# Altium PCB PCB1.PcbDoc
Units mm, origin at the board's own origin, x right, y up, seen from the top; angles counter-clockwise.
Board outline 50.16 x 18.03 mm, 2 copper layers (Top Layer, Bottom Layer); 8 components, 7 nets, 31 pads, 4 vias.
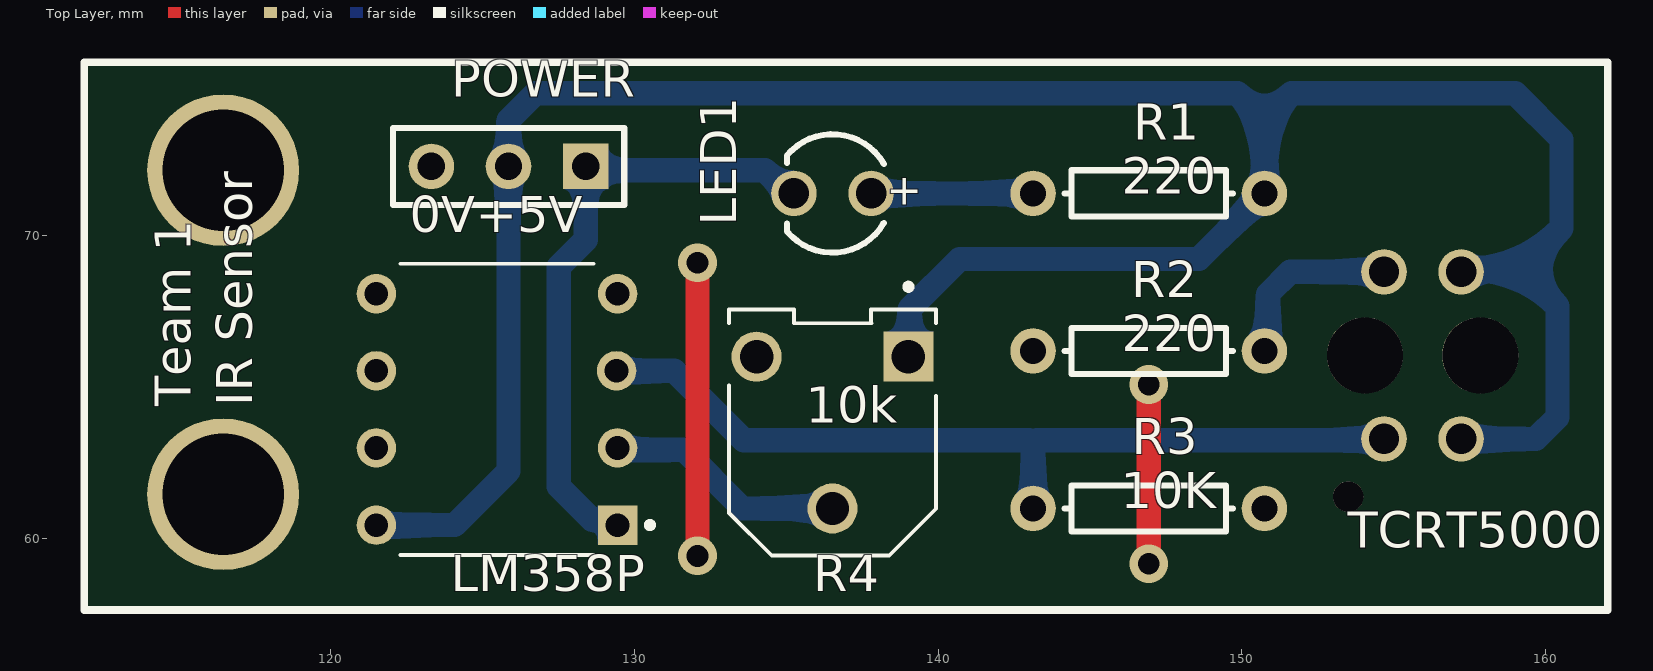
[diagram p0: Top Layer view]
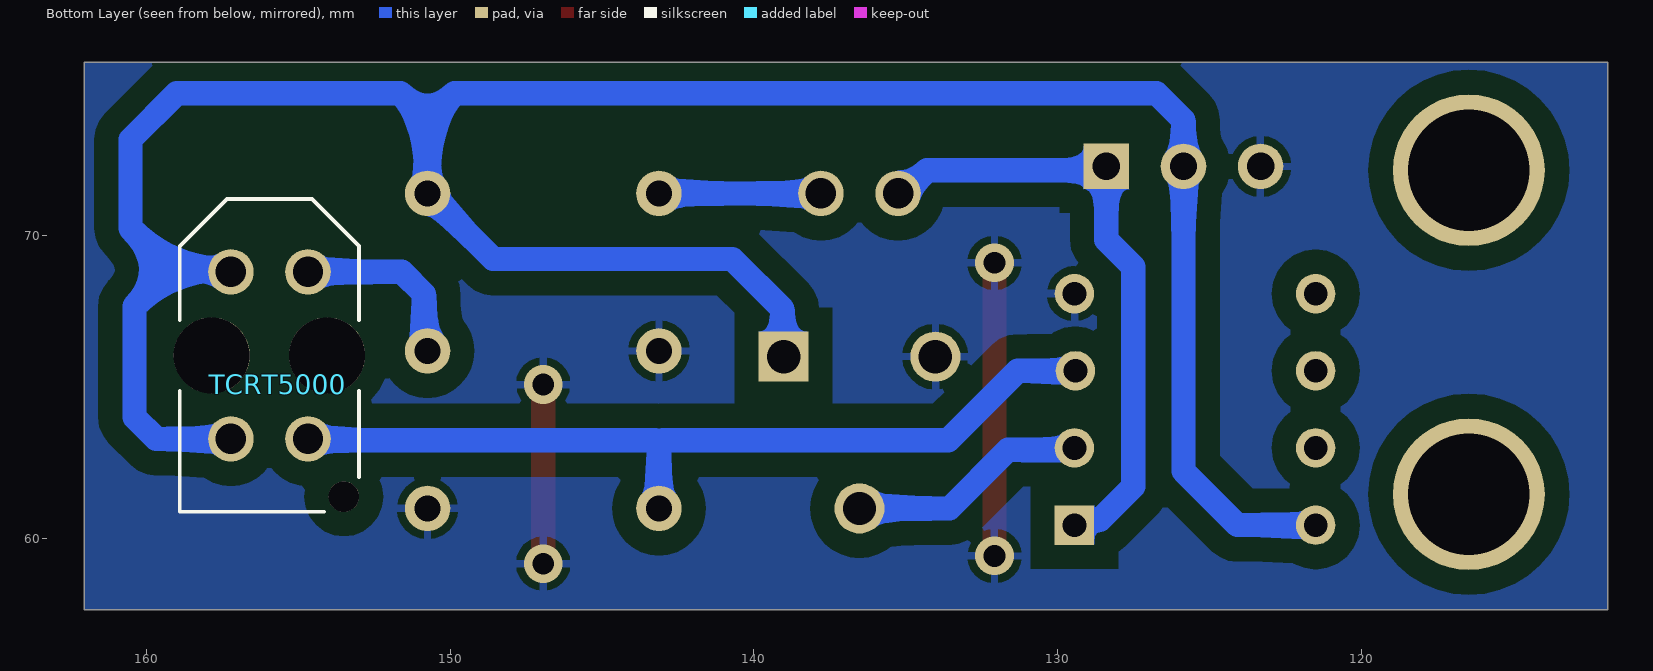
[diagram p1: Bottom Layer view, seen from below]

## Layer stack, top to bottom
Top Solder: solder mask 0.0102, Solder Resist, Dk 3.5
Top Layer: signal copper 0.0356
Dielectric 1: dielectric 0.32, FR-4, Dk 4.8
Bottom Layer: signal copper 0.0356
Bottom Solder: solder mask 0.0102, Solder Resist, Dk 3.5

## Board outline
111.887,57.658 162.052,57.658 162.052,75.692 111.887,75.692

## Design rules (kind name [scope] priority, off if disabled: settings)
Clearance B_GND [InNamedPolygon('B_GND')] p1: gap=0.8 ignorepadtopadclearanceinfootprint=FALSE
Clearance [All] p2: gap=0.8 ignorepadtopadclearanceinfootprint=FALSE
PolygonConnect [All] p1: connectstyle=Relief reliefconductorwidth=0.254 reliefentries=4 polygonreliefangle="90 Angle" airgapwidth=0.254
RoutingVias [All] p1: holewidth=0.711 width=1.27 viastyle="Through Hole" minholewidth=0.711 minwidth=1.27 maxholewidth=0.711 maxwidth=1.27
SolderMaskExpansion [All] p1: expansion=0.102 istentingtop=FALSE
UnRoutedNet [All] p1: checkbadconnections=TRUE
Width [All] p1: maxlimit=0.8 minlimit=0.8 preferedwidth=0.8
29 further rules are at their usual default settings.

## Components (designator, comment, footprint, x,y, rotation, side; value= is the part's Value field where it differs from the comment)
LED1 "151031SS06000" WL-TIRW_D3.9H5.3 136.525,71.374 r180 top
LM358P "" DIP794W45P254L959H508Q8 125.476,64.262 r180 top
POWER "" HDR1X3 128.397,72.263 r180 top
R1 "220" AXIAL-0.3 146.939,71.374 r0 top value=1K
R2 "220" AXIAL-0.3 146.939,66.187 r0 top
R3 "10K" AXIAL-0.3 146.939,61 r180 top
R4 "10k" TRIM_3306F-1-203 136.525,63.5 r90 top
TCRT5000 "" OPTO_TCRT5000 155.956,66.04 r90 bottom

## Footprints (in the part's own frame and the unit in brackets; to place one, negate y for a bottom-side part, rotate by r counter-clockwise, add the part's x,y. Pads: shape width x height; smd on the part's side, far side on the other; paste and mask are expansions set on the pad)
AXIAL-0.3 [mm] "Axial Device, Thru-Hole; 2 Leads; 0.3 in Pin Spacing"
  round 1.5 hole 0.85: 1(-3.81,0) 2(3.81,0)
  silkscreen extent -2.77,-0.76 2.77,0.76
DIP794W45P254L959H508Q8 [mm]
  rect 1.3x1.3 hole 0.78: 1(-3.97,3.81)
  round 1.3 hole 0.78: 2(-3.97,1.27) 3(-3.937,-1.27) 4(-3.97,-3.81) 5(3.97,-3.81) 6(3.97,-1.27) 7(3.97,1.27) 8(3.97,3.81)
  silkscreen extent -5.13,-4.8 3.18,4.8, body extent -5.84,-4.67 5.08,4.92, height 4.29
HDR1X3 [mm] "Connector; Header; 3 Position"
  rect 1.5x1.5 hole 0.9: 1(0,0)
  round 1.5 hole 0.9: 2(2.54,0) 3(5.08,0)
  silkscreen extent -1.27,-1.27 6.35,1.27
OPTO_TCRT5000 [mm]
  round 1.5 hole 1: A(2.75,1.27) CATH(2.75,-1.27) COLL(-2.75,1.27) E(-2.75,-1.27)
  round 1 hole 1 unplated: ""(-4.65,-2.45)
  round 2.5 hole 2.5 unplated: ""(0,-1.9) ""(0,1.9)
  silkscreen extent -5.15,-2.95 5.15,2.95, body extent -4.97,-3.3 5.23,3.5, height 6.72
TRIM_3306F-1-203 [mm]
  rect 1.65x1.65 hole 1.1: 1(2.5,-2.5)
  round 1.65 hole 1.1: 2(-2.5,0) 3(2.5,2.5)
  silkscreen extent -4.05,-3.41 4.9,3.41, body extent -3.78,-3.17 3.02,3.38, height 6.66
WL-TIRW_D3.9H5.3 [mm] "THT Infrared Round Waterclear, body diameter 3.9mm"
  round 1.5 hole 1: 1(1.27,0) 2(-1.27,0)
  silkscreen extent -1.69,-1.95 1.5,1.95, body extent -1.95,-1.95 1.62,1.95, height 5.33

## Part data
LED1: library part CMP-1488-00002-1, "THT LED round mono-color color lens, WL-TMRW, Super Red", Emitting color="Super Red", Manufacturer="Wuerth Elektronik", ComponentLink1Description="Manufacturer URL", ComponentLink1URL=http://www.we-online.com, ComponentLink2Description=Datasheet, ComponentLink2URL=http://katalog.we-online.de/pbs/datasheet/7448042001.pdfhttp://katalog.we-online.de/pbs/datasheet/7448042001.pdfhttp://katalog.we-online.de/pbs/datasheet/7448042001.pdfhttp://katalog.we-online.de/pbs/datasheet/151031SS06000.pdf, PackageReference="Type 3mm", PartNumber=151031SS06000
LM358P: library part LM358P, "Dual Operational Amplifiers", Package="PDIP-8 Texas Instruments", Arrow_Electronics-Purchase-URL=https://snapeda.com/shop?store=Arrow+Electronics&id=559457, Availability=Unavailable, DigiKey-Purchase-URL=https://snapeda.com/shop?store=DigiKey&id=559457, MF="Texas Instruments", Mouser-Purchase-URL=https://snapeda.com/shop?store=Mouser&id=559457, MP=LM358P, Price=None, SnapEDA_Link=https://www.snapeda.com/parts/LM358P/Texas%20Instruments/view-part/559457/?ref=snap, Texas_Instruments-Purchase-URL=https://snapeda.com/shop?store=Texas+Instruments&id=559457
POWER: library part "Header 3", "Header, 3-Pin", LatestRevisionDate=17-Jul-2002, LatestRevisionNote="Re-released for DXP Platform.", Publisher="Altium Limited"
R1 R2 R3: library part Res1, "Resistor", LatestRevisionDate=17-Jul-2002, LatestRevisionNote="Re-released for DXP Platform.", PackageDescription="Axial Device, Thru-Hole; 2 Leads; 0.3 in Pin Spacing", PackageReference=AXIAL-0.3, Published=8-Jun-2000, Publisher="Altium Limited"
R4: library part 3306F-1-203, "20 kOhms 0.2W", Package="6432 Bourns", Availability=Good, MF=Bourns, MP=3306F-1-203, Price=None, Purchase-URL=https://pricing.snapeda.com/search/part/3306F-1-203/?ref=eda, SnapEDA_Link=https://www.snapeda.com/parts/3306F-1-203/Bourns/view-part/1444258/?ref=snap
TCRT5000: library part TCRT5000, "Reflective Optical Sensor 0.591 _15mm_ PCB Mount", Package="PCB Mount Vishay", Availability=Unavailable, MF=Vishay, MP=TCRT5000, Price=None, SnapEDA_Link=https://www.snapeda.com/parts/TCRT5000/Vishay%20Semiconductor%20Opto%20Division/view-part/885229/?ref=snap

## Free pads (board coordinates)
  round 5 hole 4 unplated: ""(116.459,61.468) ""(116.459,72.136)

## Via types
v1: diameter 1.27, hole 0.711, Top Layer to Bottom Layer, 4 vias

## Nets (pads, with @x,y where several pads share a name; then routed paths per layer and width w, separated by ;. In a path a pad name is that pad's centre, name@x,y a point inside that pad or via, vN(x,y) a via of type N, cw(c..) or ccw(c..) an arc to the next point about the centre after c; other vN are vias at no path point)
+5: LM358P.8 POWER.2 R1.2 R4.1 TCRT5000.A TCRT5000.COLL | length 86
  Bottom Layer w0.8: LM358P.8 124.079,60.452 125.857,62.23 POWER.2 125.857,73.787 126.746,74.676 149.86,74.676 150.749,73.787 ; R4.1 139.057,66.032 139.057,67.556 140.716,69.215 148.59,69.215 R1.2 150.749,73.787 ; TCRT5000.COLL 159.683,63.29 160.401,64.008 160.401,67.654 159.176,68.879 ; TCRT5000.A 157.315,68.879 159.176,68.879 ; 150.749,73.787 151.638,74.676 159.004,74.676 160.528,73.152 160.528,70.231 159.176,68.879
GND: LM358P.4 POWER.3 R2.1 R3.1 R4.3 | length 15.6
  Top Layer w0.8: v1(132.08,59.436) v1(132.08,69.088) ; v1(146.939,59.182) v1(146.939,65.081)
NetLED1_2: LED1.2 R1.1 | length 5.3
  Bottom Layer w0.8: LED1.2 R1.1
NetLM358P_2: LM358P.2 R4.2 | length 7.9
  Bottom Layer w0.8: LM358P.2 129.509,62.929 131.635,62.929 133.564,61 R4.2
NetLM358P_3: LM358P.3 R3.2 TCRT5000.E | length 28.5
  Bottom Layer w0.8: LM358P.3 131.318,65.532 133.604,63.246 143.002,63.246 143.129,63.119 ; R3.2 143.129,63.119 ; TCRT5000.E 154.642,63.246 143.256,63.246 143.129,63.119
NetR2_2: R2.2 TCRT5000.CATH | length 6
  Bottom Layer w0.8: R2.2 150.864,66.302 150.864,68.06 151.594,68.79 TCRT5000.CATH
out1: LED1.1 LM358P.1 POWER.1 | length 20.6
  Bottom Layer w0.8: LM358P.1 129.281,60.617 128.613,60.617 127.508,61.722 127.508,68.964 128.397,69.853 POWER.1 128.524,72.136 134.304,72.136 135.066,71.374 LED1.1
pads on no net: LM358P.5 LM358P.6 LM358P.7 TCRT5000.

## Polygon pours and split planes (outlines as drawn)
GND on Bottom Layer "B_GND" (solid, remove dead copper, pour order 0): 111.887,57.658 162.052,57.658 162.052,75.692 111.887,75.692

## Silkscreen, mask and mechanical layers (free items; w line width, h text height)
Top Overlay:
  the board outline again, w0.254
  text "0V" at 122.602,69.701 h2.03
  text "+5V" at 124.785,69.706 h2.03
  text "Team 1 / IR Sensor" at 117.817,64.36 h2.03 r90

## Text inside footprints (layer, text, board x,y; h text height)
LED1: Top Overlay "+" at 139.475,71.874 h1.02 r180